# EAGLE board nixie_panelized (EAGLE 9.1.3)
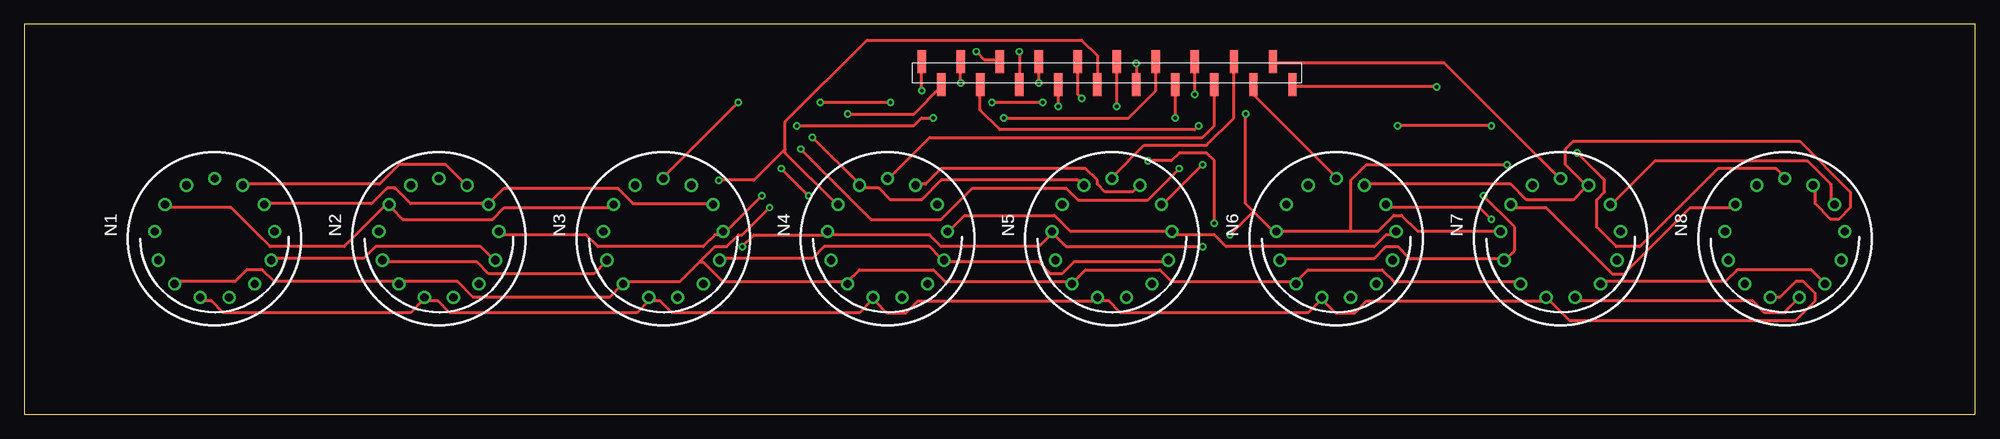
[diagram p0: board, top side]
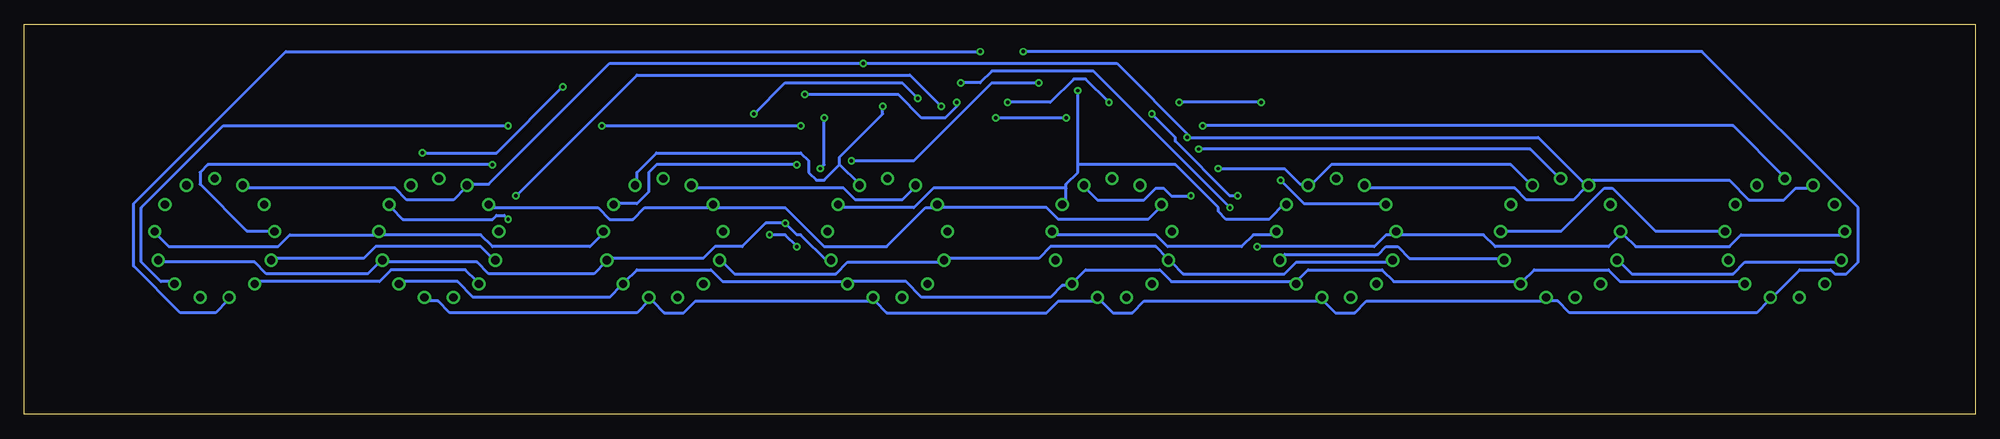
[diagram p1: board, bottom side, seen from below]

Size 200 x 40 mm. Coordinates in mm from the lower left corner, seen from the top.
Outline: 0,0 200,0 200,40 0,40 0,0
Copper layers (1*16): Top 0.035mm / dielectric 1.5mm / Bottom 0.035mm
Design rules "default": minimum track width 6mil, minimum drill 0.35mm, track to track 6mil, track to pad 6mil, pad to pad 6mil, via to via 6mil, smd to smd 6mil, copper to edge 40mil, drill to drill 6mil, minimum pad ring 10mil, minimum via ring 8mil, stop-mask expansion 4mil, vias tented up to drill 0mil, thermal gap 10mil
Net classes: 0 default: width 0.3 mm, clearance 0.5 mm

## Footprints (pad centres in the part's own frame; a part is rotated, then mirrored left to right if it is on the bottom)
PSM-210223 = smd 0.85 x 2.35: 1 0,1.175; 2 2,-1.175; 3 4,1.175; 4 6,-1.175; 5 8,1.175; 6 10,-1.175; 7 12,1.175; 8 14,-1.175; 9 16,1.175; 10 18,-1.175; 11 20,1.175; 12 22,-1.175; 13 24,1.175; 14 26,-1.175; 15 28,1.175; 16 30,-1.175; 17 32,1.175; 18 34,-1.175; 19 36,1.175; 20 38,-1.175
IN-14 = drill 0.84: 0 5.094,-3.516; 1 -5.094,-3.516; 2 -6.145,-0.746; 3 -5.788,2.195; 4 -4.105,4.633; 5 -1.481,6.01; 6 1.481,6.01; 7 4.105,4.633; 8 5.788,2.195; 9 6.145,-0.746; A 0,-6.19; LHDP 2.877,-5.481; RHDP -2.877,-5.481

## Placement (x,y rotation side)
J4  PSM-210223  [PSM-210223]  92,35 0 top
N1  IN-14  [IN-14]  19.5,18 180 top
N2  IN-14  [IN-14]  42.5,18 180 top
N3  IN-14  [IN-14]  65.5,18 180 top
N4  IN-14  [IN-14]  88.5,18 180 top
N5  IN-14  [IN-14]  111.5,18 180 top
N6  IN-14  [IN-14]  134.5,18 180 top
N7  IN-14  [IN-14]  157.5,18 180 top
N8  IN-14  [IN-14]  180.5,18 180 top

## Library data of the parts
J4 N1-N8 = taki-library

## Nets
N$88: J4.1 N1.1 N2.1 N3.1 N4.1 N5.1 N6.1 N7.1 N8.1
N$89: J4.3 N1.3 N2.3 N3.3 N4.3 N5.3 N6.3 N7.3 N8.3
N$91: J4.4 N1.4 N2.4 N3.4 N4.4 N5.4 N6.4 N7.4 N8.4
N$92: J4.5 N1.5 N2.5 N3.5 N4.5 N5.5 N6.5 N7.5 N8.5
N$93: J4.7 N1.7 N2.7 N3.7 N4.7 N5.7 N6.7 N7.7 N8.7
N$95: J4.8 N1.8 N2.8 N3.8 N4.8 N5.8 N6.8 N7.8 N8.8
N$96: J4.9 N1.9 N2.9 N3.9 N4.9 N5.9 N6.9 N7.9 N8.9
N$97: J4.12 N1.LHDP N2.LHDP N3.LHDP N4.LHDP N5.LHDP N6.LHDP N7.LHDP N8.LHDP
N$98: J4.11 N1.RHDP N2.RHDP N3.RHDP N4.RHDP N5.RHDP N6.RHDP N7.RHDP N8.RHDP
N$99: J4.2 N1.2 N2.2 N3.2 N4.2 N5.2 N6.2 N7.2 N8.2
N$100: J4.6 N1.6 N2.6 N3.6 N4.6 N5.6 N6.6 N7.6 N8.6
N$101: J4.10 N1.0 N2.0 N3.0 N4.0 N5.0 N6.0 N7.0 N8.0
N$102: J4.13 N1.A
N$103: J4.14 N2.A
N$104: J4.15 N3.A
N$105: J4.16 N4.A
N$106: J4.17 N5.A
N$107: J4.18 N6.A
N$108: J4.19 N7.A
N$109: J4.20 N8.A

## Tracks (layer width: path | path; a pad name or v marks a point on that pad's centre or on a via)
N$88  (via drill 0.35)
  Top 0.3: v150.4,20 149.2,21.2 139.6,21.2 N6.1 | N8.1 185.2,21.6 185.2,23.6 182.8,26 167.2,26 162.8,21.6 N7.1 | v92,33.2 J4.1 | N1.1 24.8,21.6 35.6,21.6 37.2,23.2 38,23.2 39.6,21.6 47.2,21.6 N2.1 47.6,21.6 49.2,23.2 60.8,23.2 62.4,21.6 70.4,21.6 N3.1 | v120.8,25.6 116.8,21.6 N5.1
  Bottom 0.3: v150.4,20 150.8,20.4 151.6,20.4 152,20 161.2,20 162.4,21.2 N7.1 | 92,25.6 92,24.8 93.2,23.6 93.2,23.2 | 92,25.6 v92,33.2 | 93.2,23.2 93.2,21.6 N4.1 | 93.2,23.2 106.8,23.2 108.8,21.2 116.4,21.2 N5.1 | 92,25.6 82,25.6 77.6,21.2 77.6,20.8 76.8,20 72.4,20 70.8,21.6 N3.1 | v120.8,25.6 135.2,25.6 136,24.8 136,22.8 137.2,21.6 139.2,21.6 N6.1
N$89  (via drill 0.35)
  Top 0.3: N1.3 25.6,16 34.8,16 36,17.2 46.8,17.2 48,16 N2.3 | N3.3 71.6,16 80.8,16 82,17.2 92.8,17.2 94,16 N4.3 94.4,15.6 104,15.6 105.2,14.4 106.4,14.4 107.6,15.6 117.2,15.6 N5.3 | v96,34 J4.3 | v115.2,26 117.6,26 118.4,26.8 121.2,26.8 122,26 v122,19.6
  Bottom 0.3: N2.3 48.4,16 58,16 59.2,17.2 60.4,17.2 61.2,16.4 70.8,16.4 71.2,16 N3.3 | v96,34 100.8,34 108.8,26 v115.2,26 | N5.3 117.6,15.6 120.4,18.4 120.8,18.4 v122,19.6 124,19.6 126.4,17.2 129.2,17.2 130.4,16 140,16 N6.3 140.4,15.6 141.6,14.4 152.4,14.4 153.6,15.6 163.2,15.6 N7.3 163.6,15.6 164.8,14.4 175.2,14.4 176.4,15.6 186,15.6 N8.3
N$91  (via drill 0.35)
  Top 0.3: J4.4 98,31.2 100,29.2 120,29.2 v120.4,29.6 | v150.4,29.6 v140.8,29.6 | N7.4 162,13.6 174.4,13.6 175.6,14.8 183.2,14.8 184.4,13.6 N8.4
  Bottom 0.3: v140.8,29.6 v120.4,29.6 | v150.4,29.6 179.6,29.6 188,21.2 188,15.6 186,13.6 184.8,13.6 N8.4 | N1.4 24,13.6 36.4,13.6 37.6,14.8 45.2,14.8 46.4,13.6 N2.4 46.8,13.6 59.6,13.6 60.8,14.8 68.4,14.8 69.6,13.6 N3.4 70,13.6 82.4,13.6 83.6,14.8 91.2,14.8 92.4,13.6 N4.4 92.8,13.2 93.6,13.2 94.8,12 108,12 109.6,13.6 115.6,13.6 N5.4 116,13.6 128.4,13.6 129.6,14.8 137.2,14.8 138.4,13.6 N6.4 138.8,13.2 140,12 154,12 155.6,13.6 161.6,13.6 N7.4
N$92  (via drill 0.35)
  Top 0.3: v97.6,37.2 98.4,36.4 100,36.4 J4.5 | N7.5 159.2,11.6 177.2,11.6 178.4,10.4 180.4,10.4 181.6,11.6 N8.5
  Bottom 0.3: v97.6,37.2 28,37.2 12,21.2 12,15.6 13.2,14.4 14.4,14.4 14.8,14.8 18,14.8 20.8,12 N1.5 21.2,11.6 22.4,10.4 41.6,10.4 42.8,11.6 43.6,11.6 N2.5 44,11.6 62.4,11.6 63.6,10.4 65.6,10.4 66.8,11.6 N3.5 67.2,11.6 85.2,11.6 86.4,10.4 88.4,10.4 89.6,11.6 N4.5 90,11.6 94,11.6 95.2,10.4 111.6,10.4 112.8,11.6 N5.5 113.2,11.6 131.2,11.6 132.4,10.4 134.4,10.4 135.6,11.6 N6.5 136,11.6 137.2,10.4 156.4,10.4 157.6,11.6 158.8,11.6 N7.5
N$93  (via drill 0.35)
  Top 0.3: N1.7 15.6,13.6 21.6,13.6 22.8,14.8 24.4,14.8 25.6,13.6 38,13.6 N2.7 38.4,13.6 44.4,13.6 46,12 60,12 61.2,13.2 N3.7 61.6,13.6 67.2,13.6 69.2,15.6 | v104,34 J4.7 | v76.4,21.2 73.6,18.4 73.2,18.4 72,17.2 70.8,17.2 69.2,15.6 | 69.2,15.6 69.6,15.6 71.6,13.6 84,13.6 N4.7 84.4,13.6 85.6,14.8 93.2,14.8 94.4,13.6 107.2,13.6 N5.7 107.6,13.6 108.8,14.8 116.4,14.8 117.6,13.6 130,13.6 N6.7 130.4,13.6 131.6,14.8 139.2,14.8 140.4,13.6 153.2,13.6 N7.7
  Bottom 0.3: v104,34 102,34 100.8,35.2 90.4,35.2 v76.4,21.2 | N8.7 176,13.6 163.6,13.6 162.4,14.8 154.8,14.8 153.6,13.6 N7.7
N$95  (via drill 0.35)
  Top 0.3: v106,31.6 J4.8 | v149.6,22.4 152.8,19.2 152.8,16.8 152,16 N7.8 151.6,16 142,16 140.8,17.2 139.6,17.2 138.4,16 128.8,16 N6.8 | N2.8 36.8,15.6 46.4,15.6 47.6,14.4 58.4,14.4 59.6,15.6 N3.8
  Bottom 0.3: v106,31.6 109.2,34.8 137.2,34.8 v149.6,22.4 | N8.8 174.4,16 165.2,16 164,17.2 153.2,17.2 152,16 N7.8 | N6.8 128.4,15.6 127.2,14.4 116.8,14.4 115.6,15.6 106,15.6 N5.8 105.6,16 96,16 94.8,17.2 84,17.2 82.8,16 N4.8 82.4,15.6 81.2,14.4 70.8,14.4 69.6,15.6 60,15.6 N3.8 | N1.8 14,15.6 23.6,15.6 24.8,14.4 35.2,14.4 36.4,15.6 N2.8
N$96  (via drill 0.35)
  Top 0.3: J4.9 108,32.8 v108.4,32.4 | v125.2,30.8 125.2,21.6 126,20.8 | 126,20.8 128,18.8 N6.9 128.4,18.8 136,18.8 | 136,18.8 138.8,18.8 140.4,20.4 141.2,20.4 142.8,18.8 151.2,18.8 N7.9 | v152,25.6 137.6,25.6 136,24 136,18.8 | v73.6,17.2 74.8,18.4 82,18.4 N4.9 82.4,18.4 92.8,18.4 94,17.2 104,17.2 105.2,18.4 N5.9 105.6,18.4 106.8,17.2 v120.8,17.2 | v123.6,18.4 126,20.8
  Bottom 0.3: v108.4,32.4 110,34 122,34 v125.2,30.8 | v152,25.6 181.2,25.6 182,24.8 182,23.6 177.2,18.8 174.4,18.8 N8.9 | N1.9 13.6,18.4 24,18.4 25.2,17.2 34.8,17.2 36,18.4 N2.9 36.4,18.4 37.6,17.2 49.2,17.2 50.4,18.4 59.2,18.4 N3.9 59.6,18.4 60.4,18.4 61.6,17.2 v73.6,17.2 | v123.6,18.4 122,18.4 v120.8,17.2
N$97  (via drill 0.35)
  Top 0.3: N5.LHDP 108.4,23.6 108,24 94,24 92,22 88.8,22 87.6,23.2 86,23.2 N4.LHDP 85.6,23.6 v80.8,28.4 | v114,36 J4.12
  Bottom 0.3: N6.LHDP 131.6,23.2 116,23.2 114.8,22 110,22 108.8,23.2 N5.LHDP | N1.LHDP 16.8,23.2 18.4,23.2 19.6,22 23.2,22 25.2,24 39.2,24 39.6,23.6 N2.LHDP | N3.LHDP 62.4,23.2 47.2,23.2 46,22 41.2,22 40,23.2 N2.LHDP | N8.LHDP 177.6,23.2 162,23.2 160.8,22 156,22 154.8,23.2 N7.LHDP 154.4,23.6 152.4,23.6 140,36 v114,36 88,36 80.4,28.4 | 80.4,28.4 44.8,28.4 40,23.6 N2.LHDP | 80.4,28.4 v80.8,28.4
N$98  (via drill 0.35)
  Top 0.3: N1.RHDP 22.4,23.6 36.4,23.6 38.4,25.6 43.2,25.6 45.2,23.6 N2.RHDP | v112,31.6 J4.11 | N4.RHDP 91.6,23.6 92.4,23.6 94,25.2 108.8,25.2 110,24 110,23.6 110.8,22.8 113.6,22.8 114,23.2 N5.RHDP | N6.RHDP 137.6,23.6 152.4,23.6 154,22 158.8,22 160,23.2 N7.RHDP 160,23.6 158,25.6 158,27.2 158.8,28 182,28 187.2,22.8 187.2,21.2 186,20 185.2,20 183.6,21.6 183.6,23.2 N8.RHDP | v80.4,22.4 v77.6,25.2
  Bottom 0.3: N2.RHDP 45.6,23.6 47.6,25.6 66,25.6 68,23.6 N3.RHDP 68.4,23.6 69.2,23.6 70.8,25.2 v77.6,25.2 | v112,31.6 112,30.8 116.4,26.4 116.4,25.6 | 116.4,25.6 114.4,23.6 N5.RHDP | 116.4,25.6 118,24 118.8,24 119.6,24.8 119.6,26 120.4,26.8 135.2,26.8 137.2,24.8 137.2,23.6 N6.RHDP | v80.4,22.4 82.4,22.4 83.2,23.2 84,23.2 85.2,22 90,22 91.2,23.2 N4.RHDP
N$99  (via drill 0.35)
  Top 0.3: N6.2 140.4,18.4 139.6,18.4 138.4,17.2 123.2,17.2 122,18.4 118,18.4 N5.2 117.6,18.8 107.2,18.8 105.6,20.4 96.4,20.4 94.8,18.8 N4.2 | v84.4,30.8 91.2,30.8 94,33.6 J4.2 | v75.6,22.4 72,18.8 N3.2 71.6,18.4 70.8,18.4 69.6,17.2 58.8,17.2 57.6,18.4 48.8,18.4 N2.2
  Bottom 0.3: N1.2 26,18.8 32.8,18.8 37.2,23.2 38,23.2 42.4,18.8 48.4,18.8 N2.2 | N8.2 186.4,18.4 185.2,17.2 174,17.2 172.8,18.4 164,18.4 N7.2 163.6,18.4 153.2,18.4 152,17.2 142,17.2 140.8,18.4 N6.2 | v84.4,30.8 82,28.4 82,28 76.4,22.4 v75.6,22.4 | N4.2 94.4,18.4 84,18.4 82.8,17.2 75.2,17.2 74,18.4 72,18.4 N3.2
N$100  (via drill 0.35)
  Top 0.3: v102,37.2 J4.6 | N1.6 18.4,11.6 19.2,11.6 20.4,10.4 39.6,10.4 40.8,11.6 N2.6 41.2,11.6 42.4,11.6 43.6,10.4 62.8,10.4 64,11.6 N3.6 64.4,11.6 65.2,11.6 66.4,10.4 85.6,10.4 86.8,11.6 N4.6 87.2,11.6 88.4,10.4 90.4,10.4 91.6,11.6 110,11.6 N5.6 110.4,11.6 111.2,11.6 112.4,10.4 131.6,10.4 132.8,11.6 N6.6 133.2,11.6 134.4,10.4 136.4,10.4 137.6,11.6 156,11.6 N7.6 156.4,11.6 158.4,9.6 181.6,9.6 183.6,11.6 183.6,12.4 182.4,13.6 181.6,13.6 180,12 179.2,12 N8.6
  Bottom 0.3: v102,37.2 173.2,37.2 188.8,21.6 188.8,15.2 184,10.4 180.4,10.4 179.2,11.6 N8.6
N$101  (via drill 0.35)
  Top 0.3: N1.0 14.8,21.2 21.2,21.2 25.2,17.2 32.8,17.2 37.2,21.6 N2.0 37.6,21.2 38.8,20 48,20 49.2,21.2 60.4,21.2 N3.0 | J4.10 110,36.8 108.4,38.4 86.4,38.4 78,30 78,27.2 | 78,27.2 78,26.8 83.2,21.6 N4.0 | N8.0 175.2,21.2 170.8,21.2 164,14.4 162.8,14.4 156,21.2 152.8,21.2 N7.0 | v71.2,24 74.8,24 78,27.2
  Bottom 0.3: N4.0 83.6,21.2 84.8,20 94,20 95.2,21.2 106.4,21.2 N5.0 106.8,21.2 107.6,21.2 111.6,17.2 118,17.2 122,21.2 129.2,21.2 N6.0 129.6,21.2 136.4,21.2 137.6,20 140,20 141.2,21.2 152.4,21.2 N7.0 | v71.2,24 68.8,21.6 60.8,21.6 N3.0
N$102  (via drill 0.35)
  Top 0.3: J4.13 116,33.2 113.2,30.4 v100.4,30.4 | v93.2,30.4 92,30.4 91.2,29.6 v79.2,29.6
  Bottom 0.3: v93.2,30.4 v100.4,30.4 | v79.2,29.6 24.8,29.6 19.6,24.4 N1.A
N$103  (via drill 0.35)
  Top 0.3: v118,30.4 J4.14 | v118.4,25.2 115.2,22 108,22 106.8,23.2 97.2,23.2 94,20 86.8,20 v79.6,27.2
  Bottom 0.3: v118,30.4 118,25.6 v118.4,25.2 | v79.6,27.2 45.6,27.2 42.8,24.4 N2.A
N$104  (via drill 0.35)
  Top 0.3: v120,32.8 J4.15 | v99.2,32 v104.4,32 | v81.6,32 v88.8,32 | v73.2,32 65.6,24.4 N3.A
  Bottom 0.3: v120,32.8 110.4,32.8 108,30.4 105.6,30.4 104.4,31.6 v104.4,32 | v99.2,32 94.8,32 92.4,34.4 91.2,34.4 v88.8,32 | v73.2,32 v81.6,32
N$105
  Top 0.3: J4.16 122,29.6 120.8,28.4 92.8,28.4 88.8,24.4 N4.A
N$106
  Top 0.3: J4.17 124,30.4 121.2,27.6 114.8,27.6 111.6,24.4 N5.A
N$107
  Top 0.3: J4.18 126,32.8 134.4,24.4 N6.A
N$108
  Top 0.3: J4.19 128,36 145.6,36 157.2,24.4 N7.A
N$109  (via drill 0.35)
  Top 0.3: v144.8,33.6 130,33.6 J4.20 | v159.2,26.8 162,24 162,22.8 161.2,22 161.2,19.2 163.2,17.2 165.6,17.2 173.6,25.2 179.6,25.2 180.4,24.4 N8.A
  Bottom 0.3: v144.8,33.6 151.6,26.8 v159.2,26.8

## Text on the board
_tNames: N1 | N2 | N3 | N4 | N5 | N6 | N7 | N8